# EAGLE board pic (EAGLE 5.01)

Size 160 x 100 mm. Coordinates in mm from the lower left corner, seen from the top.
Outline: 0,0 160,0 160,100 0,100 0,0
Copper layers (1*16): Top 0.035mm / dielectric 1.5mm / Bottom 0.035mm
Design rules "default *": minimum track width 35mil, minimum drill 24mil, track to track 8mil, track to pad 8mil, pad to pad 8mil, via to via 8mil, smd to smd 8mil, copper to edge 40mil, drill to drill 8mil, minimum pad ring 10mil, minimum via ring 8mil, stop-mask expansion 4mil, vias tented up to drill 0mil, thermal gap 10mil

## Footprints (pad centres in the part's own frame; a part is rotated, then mirrored left to right if it is on the bottom)
HC49/S = drill 0.813 round: 1 -2.413,0; 2 2.413,0
C2.5-2 = drill 0.813 pad 1.6 octagon: 1 -1.27,0; 2 1.27,0
70553-06 = drill 1.092 long: 1 -6.35,-7.62; 2 -3.81,-7.62; 3 -1.27,-7.62; 4 1.27,-7.62; 5 3.81,-7.62; 6 6.35,-7.62
70553-08 = drill 1.092 long: 1 -8.89,-7.62; 2 -6.35,-7.62; 3 -3.81,-7.62; 4 -1.27,-7.62; 5 1.27,-7.62; 6 3.81,-7.62; 7 6.35,-7.62; 8 8.89,-7.62
DIL40 = drill 0.813 long: 1 -24.13,-7.62; 2 -21.59,-7.62; 3 -19.05,-7.62; 4 -16.51,-7.62; 5 -13.97,-7.62; 6 -11.43,-7.62; 7 -8.89,-7.62; 8 -6.35,-7.62; 9 -3.81,-7.62; 10 -1.27,-7.62; 11 1.27,-7.62; 12 3.81,-7.62; 13 6.35,-7.62; 14 8.89,-7.62; 15 11.43,-7.62; 16 13.97,-7.62; 17 16.51,-7.62; 18 19.05,-7.62; 19 21.59,-7.62; 20 24.13,-7.62; 21 24.13,7.62; 22 21.59,7.62; 23 19.05,7.62; 24 16.51,7.62; 25 13.97,7.62; 26 11.43,7.62; 27 8.89,7.62; 28 6.35,7.62; 29 3.81,7.62; 30 1.27,7.62; 31 -1.27,7.62; 32 -3.81,7.62; 33 -6.35,7.62; 34 -8.89,7.62; 35 -11.43,7.62; 36 -13.97,7.62; 37 -16.51,7.62; 38 -19.05,7.62; 39 -21.59,7.62; 40 -24.13,7.62
P0613/15 = drill 1.016 octagon: 1 -7.62,0; 2 7.62,0
TO18 = drill 0.813 octagon: 1 -1.27,-1.27; 2 1.27,-1.27; 3 1.27,1.27

## Placement (x,y rotation side)
E$1  [HC49/S]  32.38,46.19 90 top
E$2  [C2.5-2]  24.76,48.73 0 top
E$3  [C2.5-2]  24.76,43.65 0 top
E$4  [70553-06]  19.68,85.56 0 top
E$5  [70553-08]  111.12,23.33 180 top
E$6  [70553-06]  51.43,13.17 180 top
IC1  PIC16F877P  [DIL40]  47.62,55.08 270 top
R1  [P0613/15]  80.64,77.94 0 top
R2  [P0613/15]  80.64,71.59 0 top
R3  [P0613/15]  80.64,65.24 0 top
R4  [P0613/15]  80.64,58.89 0 top
R5  [P0613/15]  80.64,52.54 0 top
R6  [P0613/15]  80.64,46.19 0 top
R7  [P0613/15]  80.64,39.84 0 top
R8  [P0613/15]  109.85,77.94 0 top
R9  [P0613/15]  109.85,71.59 0 top
R10  [P0613/15]  109.85,65.24 0 top
R11  [P0613/15]  109.85,58.89 0 top
R12  [P0613/15]  109.85,52.54 0 top
R13  [P0613/15]  109.85,46.19 0 top
R14  [P0613/15]  109.85,39.84 0 top
T1  [TO18]  95.88,41.11 270 top
T2  [TO18]  95.88,60.16 270 top
T3  [TO18]  95.88,79.21 270 top
T4  [TO18]  95.88,53.81 270 top
T5  [TO18]  95.88,47.46 270 top
T6  [TO18]  95.88,72.86 270 top
T7  [TO18]  95.88,66.51 270 top

## Library data of the parts
E$1 = crystal
E$2 E$3 = capacitor-wima
E$4-E$6 = con-molex
IC1 = microchip
R1-R14 = resistor
T1-T7 = transistor

## Nets
S$1: R1.2 T3.2
S$2: R2.2 T6.2
S$3: R3.2 T7.2
S$4: R4.2 T2.2
S$5: R7.2 T1.2
S$6: R6.2 T5.2
S$7: R5.2 T4.2
S$8: E$5.2 R8.1 T3.3
S$9: E$5.3 R9.1 T6.3
S$10: E$5.4 R10.1 T7.3
S$11: E$5.5 R11.1 T2.3
S$12: E$5.6 R12.1 T4.3
S$13: E$5.7 R13.1 T5.3
S$14: E$5.8 R14.1 T1.3
S$15: T1.1 T2.1 T3.1 T4.1 T5.1 T6.1 T7.1
S$16: IC1.39 R1.1
S$17: IC1.38 R2.1
S$18: IC1.37 R3.1
S$19: IC1.36 R4.1
S$20: IC1.35 R5.1
S$21: IC1.34 R6.1
S$22: IC1.33 R7.1
S$23: E$1.2 E$2.2 IC1.13
S$24: E$1.1 E$3.2 IC1.14
S$25: E$6.3 IC1.20
S$26: E$6.2 IC1.19
S$27: E$6.1 IC1.21
VDD: E$4.6 E$6.5 IC1.11 IC1.32 R8.2 R9.2 R10.2 R11.2 R12.2 R13.2 R14.2
VSS: E$2.1 E$3.1 E$4.4 E$6.6 IC1.12 IC1.31

## Tracks (layer width: path | path; a pad name or v marks a point on that pad's centre or on a via)
S$1  (1 unrouted)
S$2  (1 unrouted)
S$3  (1 unrouted)
S$4  (1 unrouted)
S$5  (1 unrouted)
S$6  (1 unrouted)
S$7  (1 unrouted)
S$8  (2 unrouted)
S$9  (2 unrouted)
S$10  (2 unrouted)
S$11  (2 unrouted)
S$12  (2 unrouted)
S$13  (2 unrouted)
S$14  (2 unrouted)
S$15  (6 unrouted)
S$16  (1 unrouted)
S$17  (1 unrouted)
S$18  (1 unrouted)
S$19  (1 unrouted)
S$20  (1 unrouted)
S$21  (1 unrouted)
S$22  (1 unrouted)
S$23  (2 unrouted)
S$24  (2 unrouted)
S$25  (1 unrouted)
S$26  (1 unrouted)
S$27  (1 unrouted)
VDD  (10 unrouted)
VSS  (5 unrouted)